# Altium PCB PCB2.PcbDoc (part 4 of 4)
Units mm, origin at the board's own origin, x right, y up, seen from the top; angles counter-clockwise.
Board outline 94 x 91 mm, 2 copper layers (Top Layer, Bottom Layer); 387 components, 398 nets, 1559 pads, 0 vias.
Unrouted connection lines stored in the file: 857.
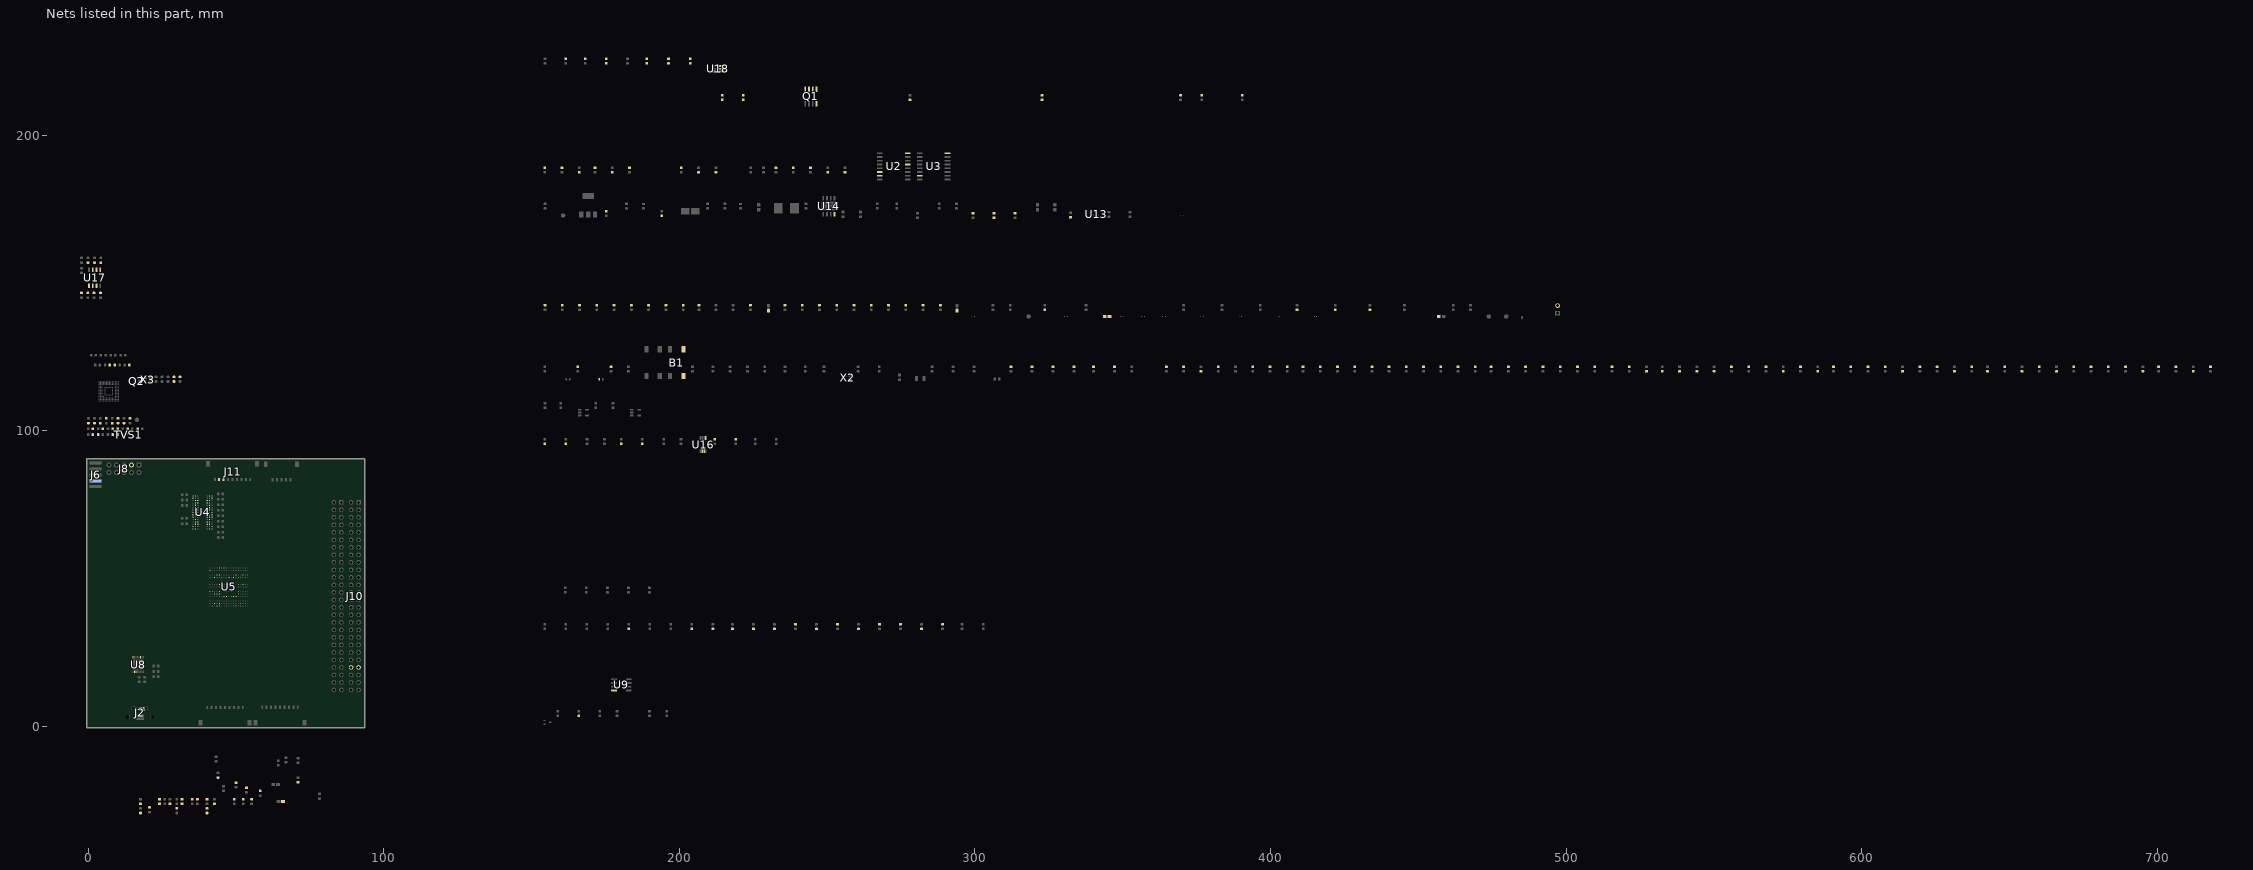
[diagram p3: the nets of this part, all layers, seen from the top]

## Nets (pads, with @x,y where several pads share a name; then routed paths per layer and width w, separated by ;. In a path a pad name is that pad's centre, name@x,y a point inside that pad or via, vN(x,y) a via of type N, cw(c..) or ccw(c..) an arc to the next point about the centre after c; other vN are vias at no path point) (continued)
NetR134_1: R134.1 U8.3
NetR135_1: R135.1 U8.26
NetR136_1: R136.1 X3.1
NetR137_2: R137.2 R138.2 R139.1 SB19.2 U8.27
NetR153_1: R153.1 U9.8
NetR156_1: R156.1 R158.2 U13.1
NetR157_2: R157.2
NetR158_1: R158.1 R159.2 U13.2
NetR163_1: R163.1 R164.2 U14.4
NetR170_2: R170.2 R175.1 U16.3
NetR171_2: R171.2 R174.1 U16.2
NetR176_1: R176.1 R177.1 U16.5
NetR180_1: R180.1
NetR181_2: R181.2
NetR182_2: R182.2
NetR183_1: R183.1
NetR184_2: R184.2
NetR185_1: R185.1
NetR186_2: R186.2
NetR187_1: R187.1
NetR188_2: R188.2
NetR189_1: R189.1
NetR190_1: R190.1
NetR191_1: R191.1
NetR192_1: R192.1
NetR194_1: R194.1
NetR200_1: R200.1 R203.2 U17.1
NetR201_1: R201.1 U17.7
NetR202_1: R202.1 U17.3
NetR204_2: R204.2 U17.6
NetR205_2: R205.2 U17.5
NetR206_2: R206.2 U17.2
NetR207_1: R207.1 U18.6
NetR208_1: R208.1 R211.2
NetR208_2: R208.2 R212.2 U18.3
NetR209_1: R209.1 U18.5
NetR210_1: R210.1 U18.4
NetSB1_1: SB1.1 U3.16
NetSB2_1: SB2.1 U2.13
NetSB3_2: SB3.2 U2.6
NetSB8_2: SB8.2 SB9.2 SB10.2 SB11.2 SB12.2 SB13.2 U5.A7 U5.D17 U5.U11
NetSB14_2: SB14.2 SB15.2 U5.A6 U5.C17 U5.U12
NetSB17_1: SB17.1 U5.P17
NetSB18_2: SB18.2 U5.B1
NetU5_H15: U5.H15
OSC_24M: R135.2 X3.4
OSC_25M: R97.1 X2.3
QSPI_BK1_IO0: R25.2 R59.2
QSPI_BK1_IO1: R31.1 R98.2
QSPI_BK1_IO2: R32.2 R96.2
QSPI_BK1_IO3: R23.1 R94.2
QSPI_BK1_NCS: R35.2 R49.1 SB4.1 U2.7 U3.7
QSPI_BK2_IO0: R26.2 R27.2 R66.1
QSPI_BK2_IO1: R29.1 R33.1 R67.1
QSPI_BK2_IO2: R30.2 R34.2 R55.1
QSPI_BK2_IO3: R24.1 R28.1 R61.1
QSPI_BK2_NCS: R36.2 SB3.1 SB4.2 SB5.1
QSPI_CLK: R99.2 SB1.2 SB2.2 U2.16
REFSEL0: R142.2 R146.1 U8.8
REFSEL1: R143.2 R147.1 U8.11
REFSEL2: R144.2 R148.1 U8.14
RESET#: B1.3 B1.4 C28.2 J6.7 J8.3 R19.1 R207.2 SB19.1 U5.K1 U6.1
SDIO1_CK: R20.1 U5.C12
SDIO1_CMD: R18.1 R21.1 U5.D12
SDIO1_D0: R1.1 R9.1 U5.E13
SDIO1_D1: R2.1 R10.1 U5.E14
SDIO1_D2: R3.1 R11.1 U5.A13
SDIO1_D3: R4.1 R12.1 SB5.2 U5.B13
SDIO1_D4: R5.1 R13.1 U5.D5
SDIO1_D5: R6.1 R14.1 U5.D4
SDIO1_D6: R7.1 R15.1 U5.F14
SDIO1_D7: R8.1 R16.1 U5.F13
SDRAM_A0: R88.2 U4.G8
SDRAM_A1: R89.2 U4.G9
SDRAM_A2: R90.2 U4.F7
SDRAM_A3: R91.2 U4.F3
SDRAM_A4: R92.2 U4.G1
SDRAM_A5: R93.2 U4.G2
SDRAM_A6: R101.2 U4.G3
SDRAM_A7: R102.2 U4.H1
SDRAM_A8: R103.2 U4.H2
SDRAM_A9: R104.2 U4.J3
SDRAM_A10: R38.1 U4.G7
SDRAM_A11: R41.1 U4.H9
SDRAM_BA0: R45.1 U4.J7
SDRAM_BA1: R47.1 U4.H8
SDRAM_D0: R60.2 U4.R8
SDRAM_D1: R62.2 U4.N7
SDRAM_D2: R37.2 U4.R9
SDRAM_D3: R40.2 U4.N8
SDRAM_D4: R70.2 U4.P9
SDRAM_D5: R72.2 U4.M8
SDRAM_D6: R74.2 U4.M7
SDRAM_D7: R76.2 U4.L8
SDRAM_D8: R78.2 U4.L2
SDRAM_D9: R80.2 U4.M3
SDRAM_D10: R82.2 U4.M2
SDRAM_D11: R84.2 U4.P1
SDRAM_D12: R86.2 U4.N2
SDRAM_D13: R52.2 U4.R1
SDRAM_D14: R54.2 U4.N3
SDRAM_D15: R57.2 U4.R2
SDRAM_D16: R73.2 U4.E8
SDRAM_D17: R75.2 U4.D7
SDRAM_D18: R77.2 U4.D8
SDRAM_D19: R79.2 U4.B9
SDRAM_D20: R81.2 U4.C8
SDRAM_D21: R83.2 U4.A9
SDRAM_D22: R85.2 U4.C7
SDRAM_D23: R87.2 U4.A8
SDRAM_D24: R39.2 U4.A2
SDRAM_D25: R42.2 U4.C3
SDRAM_D26: R43.2 U4.A1
SDRAM_D27: R44.2 U4.C2
SDRAM_D28: R50.2 U4.B1
SDRAM_D29: R51.2 U4.D2
SDRAM_D30: R56.2 U4.D3
SDRAM_D31: R58.2 U4.E2
SDRAM_NBL0: R64.2 U4.K9
SDRAM_NBL1: R65.2 U4.K1
SDRAM_NBL2: R48.2 U4.F8
SDRAM_NBL3: R46.2 U4.F2
SDRAM_SDCKE1: R71.1 U4.J2
SDRAM_SDCLK: R53.1 U4.J1
SDRAM_SDNCAS: R63.1 U4.K7
SDRAM_SDNE1: R69.1 U4.J8
SDRAM_SDNRAS: R100.2 U4.J9
SDRAM_SDNWE: R68.1 U4.K8
T1_D: Q1.5 Q1.6 Q1.7 Q1.8 R145.2
T1_G: Q1.4 Q2.3 R141.2
ULPI_CK: R124.2 U5.T3
ULPI_D0: R134.2 U5.U2
ULPI_D1: R133.2 U5.U5
ULPI_D2: R132.2 U5.T5
ULPI_D3: R131.2 U5.P11
ULPI_D4: R130.2 U5.P12
ULPI_D5: R129.2 U5.T14
ULPI_D6: R128.2 U5.U14
ULPI_D7: R127.2 U5.A5
ULPI_DIR: R122.2 U5.M3
ULPI_NXT: R121.2 U5.M4
ULPI_STP: R123.2 U5.L2
USB_CON_N: J11.8
USB_CON_P: J11.7 R119.2
USB_HS_N: J2.2 R120.1 TVS1.A2 U8.18
USB_HS_P: J2.3 R119.1 TVS1.A1 U8.19
USB_VDDIO: C75.1 R138.1 R140.2 R142.1 R143.1 R144.1 R145.1 U8.32
VBAT_BUS: J10.45 J10.46
VBUS: FB3.2 J2.1 R118.1 U5.D15
VDD_MCU: C41.1 C42.2 C43.2 C44.2 C45.2 C46.2 C47.2 C48.2 C49.2 C50.2 C51.2 C53.2 C54.2 C55.2 C56.2 C57.2 C58.2 C59.2 C60.2 C61.2 C62.2 FB1.2 FB2.1 J1.2 SB15.1 SB16.1 SB17.2 U5.E6 U5.E9 U5.E11 U5.F5 U5.G5 U5.G13 U5.H5 U5.H13 U5.J13 U5.K5 U5.K13 U5.L5 U5.L13 U5.M5 U5.M13 U5.N7 U5.N8 U5.N10 U5.N11 U5.N12
VDD_SDC: C32.1 C33.1 C34.1 L1.1 SB7.2 SB8.1 SB9.1 SB10.1 SB14.1 U5.G2
VDDA: C52.1 C65.2 FB2.2 R117.1 U5.L1
WAKEUP: R115.2 R209.2 U5.E3
WD_DONE: R210.2 U5.U4
pads on no net: J2.4 J3.10 J3.11 J4.3 J4.4 J4.8 J4.9 J4.10 J4.11 J5.3 J5.6 J5.7 J8.10 J9.02 J9.04 J9.07 J9.16 J9.17 J9.18 J9.20 J9.22 J9.24 J9.25 J9.26 J9.27 J9.28 J9.29 J9.30 J9.31 J9.32 J9.33 J9.34 J9.35 J9.36 J9.37 J9.45 J9.46 J10.01 J10.02 J10.03 J10.04 J10.05 J10.06 J10.07 J10.08 J10.09 J10.10 J10.11 J10.12 J10.13 J10.14 J10.15 J10.16 J10.17 J10.18 J10.19 J10.20 J10.21 J10.22 J10.23 J10.24 J10.33 J10.34 J10.35 J10.36 J10.37 J10.38 J10.39 J10.40 J10.41 J10.42 J10.43 J10.44 J10.49 J10.50 J10.51 J10.52 J11.10 J11.11 U1.A1 U1.A2 U1.A7 U1.A8 U1.A9 U1.A10 U1.A11 U1.A12 U1.A13 U1.A14 U1.B1 U1.B7 U1.B8 U1.B9 U1.B10 U1.B11 U1.B12 U1.B13 U1.B14 U1.C1 U1.C3 U1.C5 U1.C7 U1.C8 U1.C9 U1.C10 U1.C11 U1.C12 U1.C13 U1.C14 U1.D1 U1.D2 U1.D3 U1.D4 U1.D12 U1.D13 U1.D14 U1.E1 U1.E2 U1.E3 U1.E5 U1.E8 U1.E9 U1.E10 U1.E12 U1.E13 U1.E14 U1.F1 U1.F2 U1.F3 U1.F10 U1.F12 U1.F13 U1.F14 U1.G1 U1.G2 U1.G3 U1.G10 U1.G12 U1.G13 U1.G14 U1.H1 U1.H2 U1.H3 U1.H12 U1.H13 U1.H14 U1.J1 U1.J2 U1.J3 U1.J12 U1.J13 U1.J14 U1.K1 U1.K2 U1.K3 U1.K6 U1.K7 U1.K10 U1.K12 U1.K13 U1.K14 U1.L1 U1.L2 U1.L3 U1.L12 U1.L13 U1.L14 U1.M1 U1.M2 U1.M3 U1.M7 U1.M8 U1.M9 U1.M10 U1.M11 U1.M12 U1.M13 U1.M14 U1.N1 U1.N3 U1.N6 U1.N7 U1.N8 U1.N9 U1.N10 U1.N11 U1.N12 U1.N13 U1.N14 U1.P1 U1.P2 U1.P7 U1.P8 U1.P9 U1.P10 U1.P11 U1.P12 U1.P13 U1.P14 U2.3 U2.11 U3.3 U3.4 U3.5 U3.6 U3.11 U3.12 U3.13 U3.14 U4.E3 U4.E7 U4.H3 U4.H7 U4.K2 U4.K3 U5.A8 U5.A11 U5.A12 U5.B5 U5.B7 U5.B8 U5.B9 U5.B11 U5.B12 U5.C5 U5.C7 U5.C8 U5.C9 U5.C11 U5.D1 U5.D7 U5.D14 U5.E4 U5.F4 U5.F16 U5.H1 U5.H2 U5.H3 U5.H16 U5.H17 U5.J1 U5.J14 U5.J15 U5.K16 U5.K17 U5.L16 U5.L17 U5.M2 U5.M16 U5.M17 U5.P3 U5.P5 U5.R1 U5.R2 U5.R6 U5.T1 U5.T2 U5.T15 U5.U3 U5.U15 U8.12 U8.15 U8.16 U8.17 U8.25 U14.2 U14.3 U14.5 U14.10 U14.11 U14.12 U14.13 U14.14 U14.15 U14.16 U14.17 U15.4

## Keep-outs
Keep-Out Layer:
  the board outline again, w0.2

## Silkscreen, mask and mechanical layers (free items; w line width, h text height)
Mechanical 1:
  lines w0.1: 0,0 93,0 93,90 0,90 0,0

## Text inside footprints (layer, text, board x,y; h text height)
J5: Top 3D Body "RefDes2" at 63.177,82.823 h1.27; Top Overlay "RefDes" at 63.495,82.823 h1.27; Top Overlay "REFDES" at 63.177,82.823 h1.27
J11: Top 3D Body "RefDes2" at 46.62,82.966 h1.27; Top Overlay "REFDES" at 46.62,82.966 h1.27; Top Overlay "RefDes" at 46.938,82.966 h1.27
TVS1: Top 3D Body "RefDes2" at 14.17,96.496 h1.27 r90; Top 3D Body "2" at 12.481,99.554 h1.27 r180; Top 3D Body "1" at 12.481,99.154 h1.27 r180; Top 3D Body "B" at 14.37,97.03 h1.27 r90; Top 3D Body "A" at 13.97,97.03 h1.27 r90; Top Overlay "REFDES" at 14.17,96.496 h1.27 r90; Top Overlay "RefDes" at 14.17,96.814 h1.27 r90; Top Overlay "2" at 12.481,99.554 h1.27 r180; Top Overlay "1" at 12.481,99.154 h1.27 r180; Top Overlay "B" at 14.37,97.03 h1.27 r90; Top Overlay "A" at 13.97,97.03 h1.27 r90; Bottom Overlay "2" at 12.481,98.284 h1.27; Bottom Overlay "1" at 12.481,97.884 h1.27; Bottom Overlay "B" at 14.37,97.665 h1.27 r90; Bottom Overlay "A" at 13.97,97.665 h1.27 r90
U2: Top 3D Body "*" at 268.859,193.294 h1.27; Top 3D Body "RefDes2" at 270.32,188.849 h1.27; Top Overlay "REFDES" at 270.32,188.849 h1.27; Top Overlay "*" at 267.259,194.361 h1.27; Top Overlay "RefDes" at 270.637,188.849 h1.27
U3: Top 3D Body "*" at 282.321,193.294 h1.27; Top 3D Body "RefDes2" at 283.781,188.849 h1.27; Top Overlay "REFDES" at 283.781,188.849 h1.27; Top Overlay "*" at 280.721,194.361 h1.27; Top Overlay "RefDes" at 284.099,188.849 h1.27
U4: Top 3D Body "A" at 33.379,77.365 h1.27; Top 3D Body "R" at 33.379,66.165 h1.27; Top 3D Body "1" at 36.135,79.588 h1.27 r90; Top 3D Body "9" at 42.535,79.588 h1.27 r90; Top 3D Body "RefDes2" at 36.478,71.765 h1.27; Top Overlay "A" at 33.379,77.365 h1.27; Top Overlay "R" at 33.379,66.165 h1.27; Top Overlay "1" at 36.135,79.588 h1.27 r90; Top Overlay "9" at 42.535,79.588 h1.27 r90; Top Overlay "RefDes" at 36.795,71.765 h1.27; Top Overlay "REFDES" at 36.478,71.765 h1.27; Bottom Overlay "A" at 34.014,77.365 h1.27; Bottom Overlay "R" at 34.014,66.165 h1.27; Bottom Overlay "1" at 34.865,79.588 h1.27 r270; Bottom Overlay "9" at 41.265,79.588 h1.27 r270
U5: Top 3D Body "A" at 39.256,52.965 h1.27; Top 3D Body "U" at 39.256,40.165 h1.27; Top 3D Body "1" at 41.835,54.909 h1.27 r90; Top 3D Body "17" at 54.635,54.909 h1.27 r90; Top 3D Body "RefDes2" at 45.377,46.565 h1.27; Top Overlay "A" at 39.256,52.965 h1.27; Top Overlay "U" at 39.256,40.165 h1.27; Top Overlay "1" at 41.835,54.909 h1.27 r90; Top Overlay "17" at 54.635,54.909 h1.27 r90; Top Overlay "RefDes" at 45.695,46.565 h1.27; Top Overlay "REFDES" at 45.377,46.565 h1.27; Bottom Overlay "A" at 39.891,52.965 h1.27; Bottom Overlay "U" at 39.891,40.165 h1.27; Bottom Overlay "1" at 40.565,54.909 h1.27 r270; Bottom Overlay "17" at 53.365,54.909 h1.27 r270
U8: Top 3D Body "RefDes2" at 16.316,23.169 h1.27 r270; Top 3D Body "*" at 18.348,23.308 h1.27 r270; Top Overlay "REFDES" at 16.316,23.169 h1.27 r270; Top Overlay "RefDes" at 16.316,22.851 h1.27 r270; Top Overlay "*" at 18.348,24.756 h1.27 r270
U16: Top 3D Body "*" at 207.823,93.891 h1.27 r90; Top 3D Body "RefDes2" at 208.661,93.154 h1.27 r90; Top Overlay "REFDES" at 208.661,93.154 h1.27 r90; Top Overlay "*" at 206.67,92.577 h1.27 r90; Top Overlay "RefDes" at 208.661,93.472 h1.27 r90
U17: Top 3D Body "RefDes2" at 2.821,149.585 h1.27 r90; Top 3D Body "*" at 1.03,149.877 h1.27 r90; Top Overlay "RefDes" at 2.821,149.902 h1.27 r90; Top Overlay "*" at -0.151,148.512 h1.27 r90; Top Overlay "REFDES" at 2.821,149.585 h1.27 r90